# Altium PCB TP3_2.PcbDoc
Units mm, origin at the board's own origin, x right, y up, seen from the top; angles counter-clockwise.
Board outline 41.5 x 68 mm, 2 copper layers (Top Layer, Bottom Layer); 36 components, 23 nets, 140 pads, 2 vias.
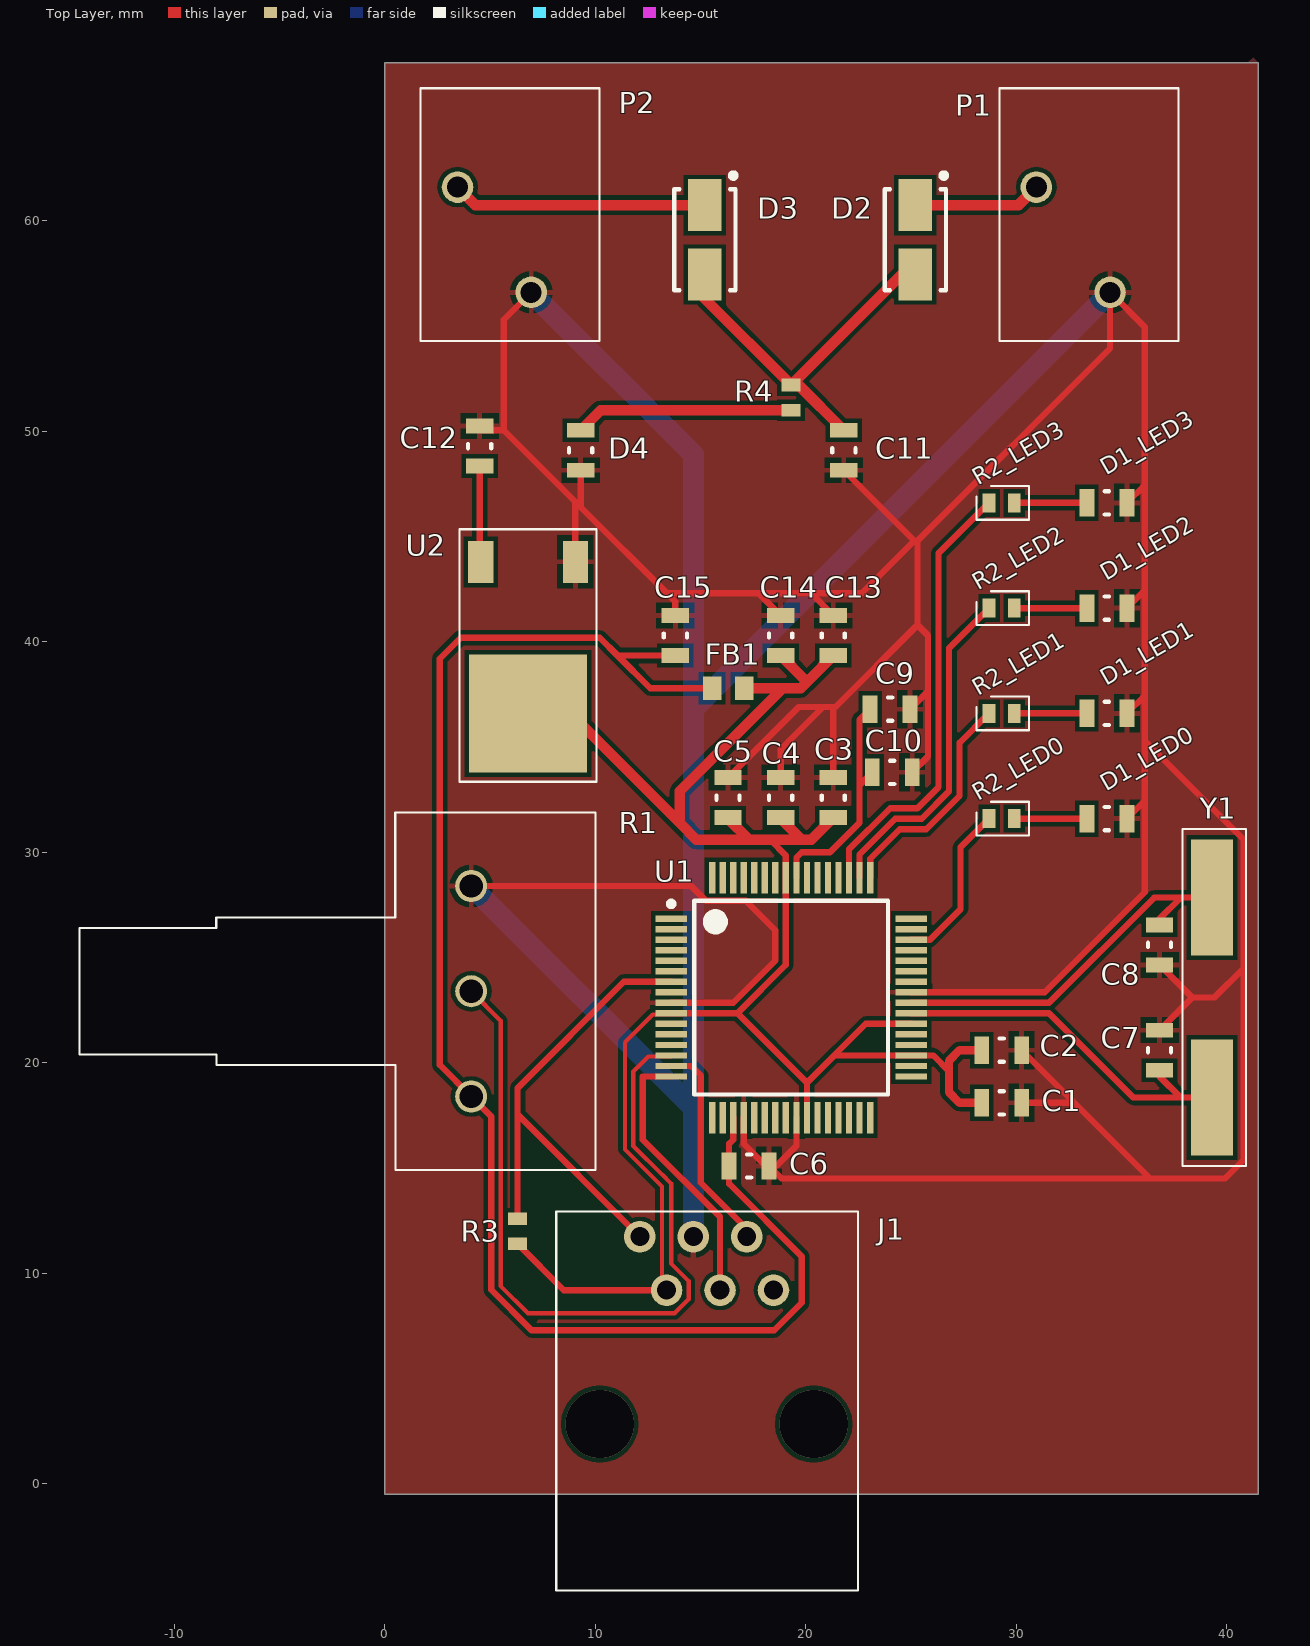
[diagram p0: Top Layer view]
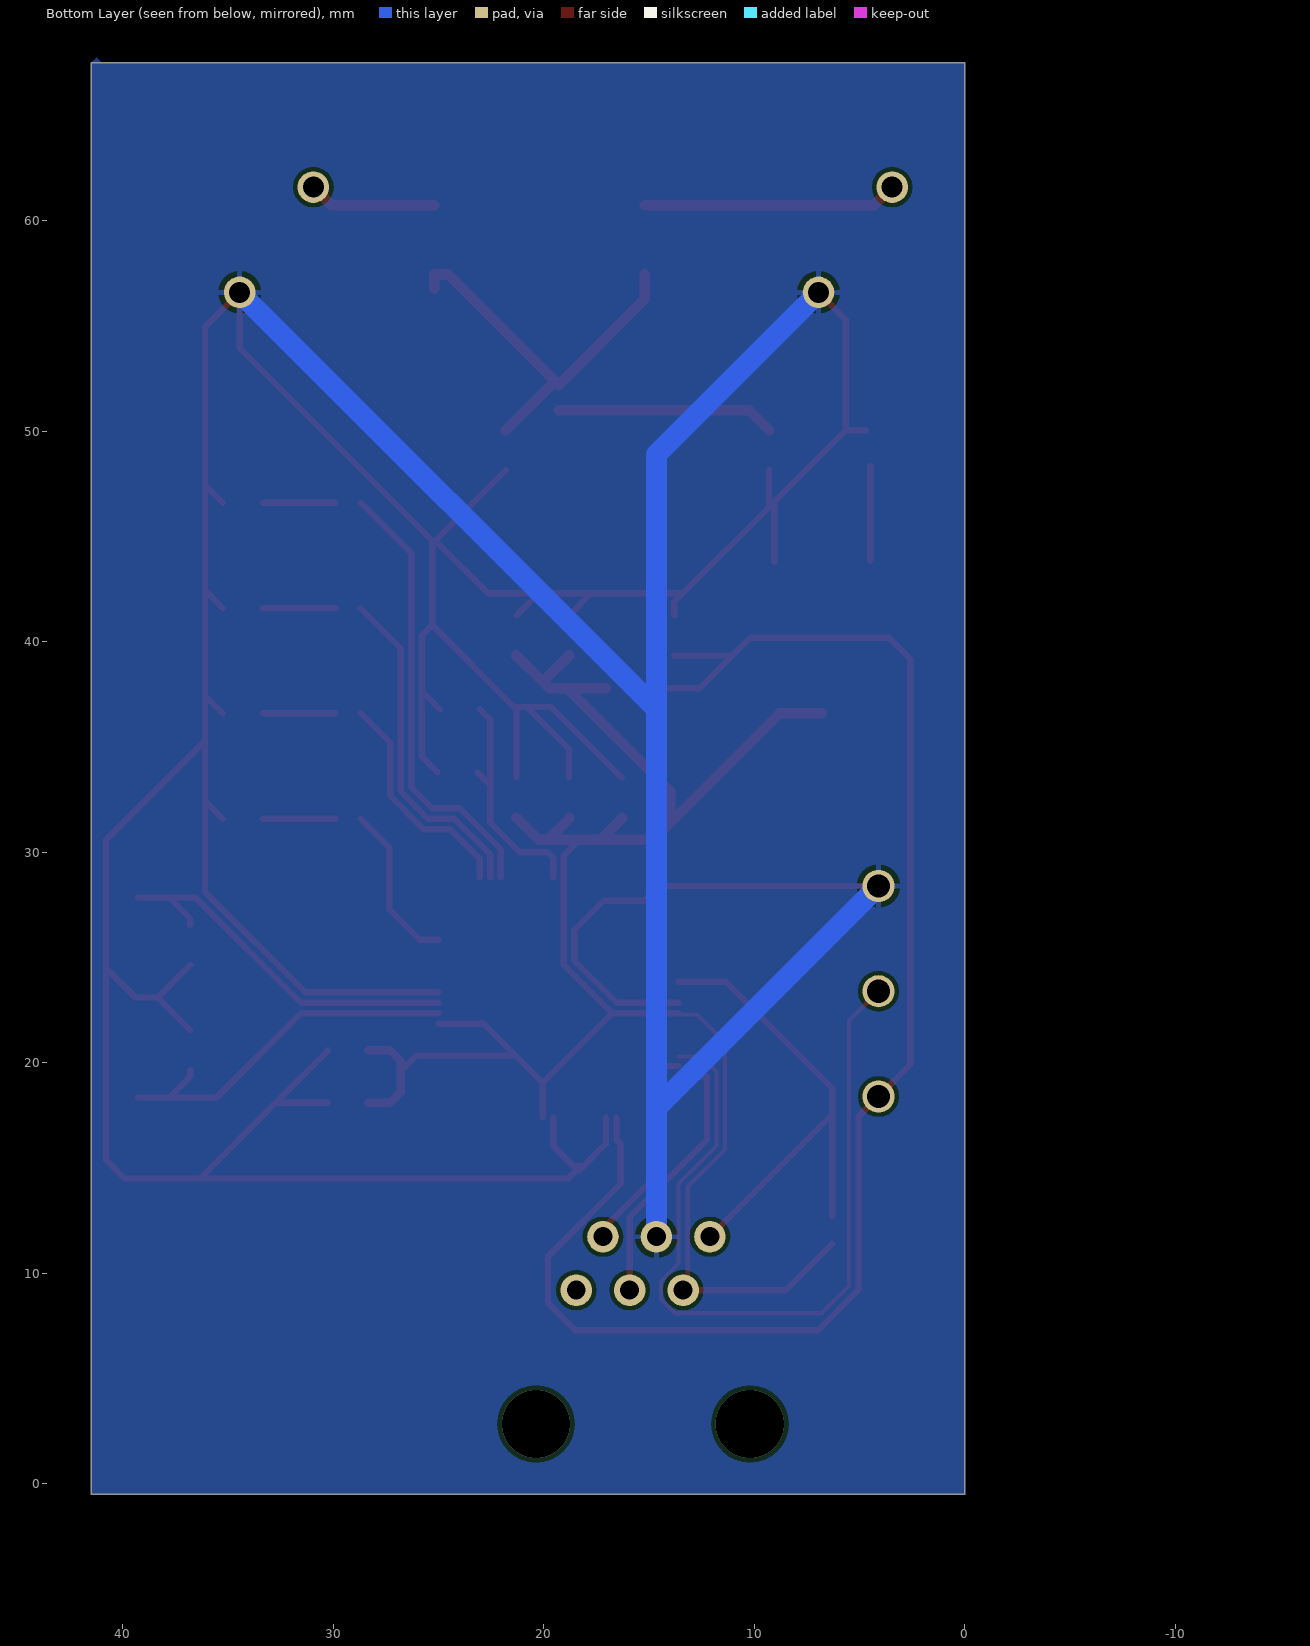
[diagram p1: Bottom Layer view, seen from below]

## Layer stack, top to bottom
Top Solder: solder mask 0.0102, Solder Resist, Dk 3.5
Top Layer: signal copper 0.0356
Dielectric 1: dielectric 0.32, FR-4, Dk 4.8
Bottom Layer: signal copper 0.0356
Bottom Solder: solder mask 0.0102, Solder Resist, Dk 3.5

## Board outline
0,-0.5 0,67.5 41.5,67.5 41.5,-0.5

## Design rules (kind name [scope] priority, off if disabled: settings)
Clearance [All] p1: gap=0.2
HoleSize [All] p1: absolutevalues=TRUE maxlimit=1000 minlimit=0.3 maxpercent=80.000 minpercent=20.000
PolygonConnect [All] p1: connectstyle=Relief reliefconductorwidth=0.254 reliefentries=4 polygonreliefangle="90 Angle" airgapwidth=0.254
RoutingVias [All] p1: holewidth=0.5 width=1 viastyle="Through Hole" minholewidth=0.3 minwidth=0.7 maxholewidth=1000 maxwidth=1000
SilkToBoardRegionClearance [InNet('No Net')] p1:
SilkToSilkClearance [All] p1: silktosilkclearance=0.1
SilkToSolderMaskClearance [IsPad] p1: minsilkscreentomaskgap=0.1 clearancetoexposedcopper=TRUE
SolderMaskExpansion [All] p1: expansion=0.102
UnpouredPolygon [All] p1: allowunpoured=FALSE
Width [All] p1: maxlimit=5 minlimit=0.2 preferedwidth=0.4
25 further rules are at their usual default settings.

## Classes and differential pairs
component class LED0: D1_LED0 R2_LED0
component class LED1: D1_LED1 R2_LED1
component class LED2: D1_LED2 R2_LED2
component class LED3: D1_LED3 R2_LED3
component class PIC: C1 C2 C3 C4 C5 C6 C7 C8 C9 C10 J1 R3
component class POWER: C11 C12 C13 C14 C15 D2 D3 D4 FB1 P1 P2 R4 U2
net class LED[0..3]: LED0 LED1 LED2 LED3
channel class led: LED0 LED1 LED2 LED3

## Components (designator, comment, footprint, x,y, rotation, side; value= is the part's Value field where it differs from the comment)
C1 "100nF" 2012/0805 29.3,18.1 r180 top
C2 "100nF" 2012/0805 29.3,20.6 r180 top
C3 "100nF" 2012/0805 21.3,32.6 r270 top
C4 "100nF" 2012/0805 18.8,32.6 r270 top
C5 "100nF" 2012/0805 16.3,32.6 r270 top
C6 "100nF" 2012/0805 17.3,15.1 r180 top
C7 "20pF" 2012/0805 36.8,20.6 r90 top
C8 "20pF" 2012/0805 36.8,25.6 r270 top
C9 "10uF" 2012/0805 24,36.8 r180 top
C10 "1uF" 2012/0805 24.1,33.8 r180 top
C11 "10uF" 2012/0805 21.8,49.1 r90 top
C12 "10uF" 2012/0805 4.5,49.3 r270 top
C13 "10uF" 2012/0805 21.3,40.3 r270 top
C14 "1uF" 2012/0805 18.8,40.3 r270 top
C15 "100nF" 2012/0805 13.8,40.3 r270 top
D1_LED0 "Green LED" 2012/0805 34.3,31.6 r0 top (schematic designator D1)
D1_LED1 "Green LED" 2012/0805 34.3,36.6 r0 top (schematic designator D1)
D1_LED2 "Green LED" 2012/0805 34.3,41.6 r0 top (schematic designator D1)
D1_LED3 "Green LED" 2012/0805 34.3,46.6 r0 top (schematic designator D1)
D2 "GF1A" SMA/DO-214AC_21 25.2,59.1 r270 top
D3 "GF1A" SMA/DO-214AC_21 15.2,59.1 r270 top
D4 "Green LED" 2012/0805 9.3,49.1 r270 top
FB1 "600r" INDC1608AN 16.3,37.8 r180 top
J1 "Program / Debug" TD03B_N 15.3,5.6 r0 top
P1 "12V Main" PHOENIX_1985195 37.7,56.6 r180 top
P2 "12V Battery" PHOENIX_1985195 10.2,56.6 r180 top
R1 "1K" Potentiometer 4.1,23.4 r90 top
R2_LED0 "330r" 1608/0603 29.3,31.6 r180 top (schematic designator R2)
R2_LED1 "330r" 1608/0603 29.3,36.6 r180 top (schematic designator R2)
R2_LED2 "330r" 1608/0603 29.3,41.6 r180 top (schematic designator R2)
R2_LED3 "330r" 1608/0603 29.3,46.6 r180 top (schematic designator R2)
R3 "4.7k" 1608/0603 6.3,12 r270 top
R4 "470r" 1608/0603 19.3,51.6 r90 top
U1 "PIC32MX764F128H-I/PT" PIC32MX 19.3,23.1 r0 top
U2 "AP1117" AP1117 6.8,36.6 r180 top
Y1 "8MHz" XTAL139X50X45 39.3,23.1 r270 top

## Footprints (in the part's own frame and the unit in brackets; to place one, negate y for a bottom-side part, rotate by r counter-clockwise, add the part's x,y. Pads: shape width x height; smd on the part's side, far side on the other; paste and mask are expansions set on the pad)
1608/0603 [mm]
  rect 0.6x0.9 smd: 1(-0.6,0) 2(0.6,0)
  body extent -0.77,-0.42 0.78,0.43, height 0.45
2012/0805 [mm]
  rect 0.7x1.3 smd: 1(-0.95,0) 2(0.95,0)
  silkscreen extent -0.1,-0.55 0.1,0.55, body extent -1,-0.6 1,0.6, height 0.45
AP1117 [mm] "Voltage Regulator"
  rect 1.2x2 smd: 1(-2.25,-7.2) 3(2.25,-7.2)
  rect 5.6x5.6 smd: 2(0,0)
  silkscreen extent -3.25,-8.75 3.25,3.25
INDC1608AN [mm]
  rect 0.88x1.12 smd: 1(-0.76,0) 2(0.76,0)
  body extent -0.9,-0.5 0.9,0.5, height 0.8
PHOENIX_1985195 [mm]
  round 1.5 hole 1: 1(6.75,-5) 2(3.25,0)
  silkscreen extent 0,-9.7 8.5,2.3
PIC32MX [mm] "TSQFP, 64-Leads, Body 10.00x10.00mm, Pitch 0.50mm, IPC Low Density"
  rect 1.5x0.3 smd: 1(-5.7,3.75) 2(-5.7,3.25) 3(-5.7,2.75) 4(-5.7,2.25) 5(-5.7,1.75) 6(-5.7,1.25) 7(-5.7,0.75) 8(-5.7,0.25) 9(-5.7,-0.25) 10(-5.7,-0.75) 11(-5.7,-1.25) 12(-5.7,-1.75) 13(-5.7,-2.25) 14(-5.7,-2.75) 15(-5.7,-3.25) 16(-5.7,-3.75) 33(5.7,-3.75) 34(5.7,-3.25) 35(5.7,-2.75) 36(5.7,-2.25) 37(5.7,-1.75) 38(5.7,-1.25) 39(5.7,-0.75) 40(5.7,-0.25) 41(5.7,0.25) 42(5.7,0.75) 43(5.7,1.25) 44(5.7,1.75) 45(5.7,2.25) 46(5.7,2.75) 47(5.7,3.25) 48(5.7,3.75)
  rect 0.3x1.5 smd: 17(-3.75,-5.7) 18(-3.25,-5.7) 19(-2.75,-5.7) 20(-2.25,-5.7) 21(-1.75,-5.7) 22(-1.25,-5.7) 23(-0.75,-5.7) 24(-0.25,-5.7) 25(0.25,-5.7) 26(0.75,-5.7) 27(1.25,-5.7) 28(1.75,-5.7) 29(2.25,-5.7) 30(2.75,-5.7) 31(3.25,-5.7) 32(3.75,-5.7) 49(3.75,5.7) 50(3.25,5.7) 51(2.75,5.7) 52(2.25,5.7) 53(1.75,5.7) 54(1.25,5.7) 55(0.75,5.7) 56(0.25,5.7) 57(-0.25,5.7) 58(-0.75,5.7) 59(-1.25,5.7) 60(-1.75,5.7) 61(-2.25,5.7) 62(-2.75,5.7) 63(-3.25,5.7) 64(-3.75,5.7)
  silkscreen extent -5.82,-4.6 4.6,4.6, body extent -5,-5 5,5, height 1.2
Potentiometer [mil]
  round 60 hole 43.31: 1(-196.85,0) 2(0,0) 3(196.85,0)
  silkscreen extent -335,-232 335,732
SMA/DO-214AC_21 [mm]
  rect 2.45x1.6 smd: 1(-1.65,0) 2(1.65,0)
  silkscreen extent -3.17,-1.45 2.4,1.48, body extent -2.37,-1.45 2.38,1.45, height 3
TD03B_N [mm]
  round 1.5 hole 0.9: 1(-3.19,6.14) 2(-1.92,3.6) 3(-0.65,6.14) 4(0.62,3.6) 5(1.89,6.14) 6(3.16,3.6)
  silkscreen extent -7.16,-10.66 7.17,7.34
XTAL139X50X45 [mm]
  rect 5.5x2 smd: 1(-4.75,0) 2(4.75,0)

## Part data
C1 C2 C3 C4 C5 C6 C7 C8 C9 C10 C12 C13 C14 C15: library part Capacitor, "Capacitor"
C11: library part Capacitor
D1_LED0 D1_LED1 D1_LED2 D1_LED3: library part LED
D2 D3: library part Diode, "Diode"
D4: library part LED, "LED"
FB1: library part Inductor, "Inductor"
J1: library part "Header 6", "Header, 6-Pin"
P1 P2: library part "Header 2", "Header, 2-Pin"
R1: library part RPot, "Potentiometer"
R2_LED0 R2_LED1 R2_LED2 R2_LED3 R3 R4: library part Resistor, "Resistor"
U1: library part PIC
U2: "Voltage Regulator"
Y1: library part Crystal, "Crystal Oscillator"

## Via types
v1: diameter 3.25, hole 3.25, Top Layer to Bottom Layer, 2 vias

## Nets (pads, with @x,y where several pads share a name; then routed paths per layer and width w, separated by ;. In a path a pad name is that pad's centre, name@x,y a point inside that pad or via, vN(x,y) a via of type N, cw(c..) or ccw(c..) an arc to the next point about the centre after c; other vN are vias at no path point)
ALIM: D2.1 P1.1 | length 6.1
  Top Layer w0.5: D2.1 30.1,60.75 P1.1
BATTERY: D3.1 P2.1 | length 12.1
  Top Layer w0.5: P2.1 4.3,60.75 D3.1
GND: C1.1 C2.1 C3.1 C4.1 C5.1 C6.1 C7.2 C8.2 C9.1 C10.1 C11.1 C12.1 C13.1 C14.1 C15.1 D1_LED0.2 D1_LED1.2 D1_LED2.2 D1_LED3.2 D4.2 J1.3 P1.2 P2.2 R1.3 U1.9 U1.20 U1.25 U1.41 U2.1 | length 325.6
  Top Layer w0.3: R1.3 14.555,28.4 15.255,27.7 17.15,27.7 18.55,26.3 18.55,24.857 16.543,22.85 U1.9 ; C12.1@4.7,50.05 5.65,50.05 ; P2.2 5.65,55.3 5.65,50.05 ; U2.1 9.05,46.65 ; D4.2 9.3,46.4 ; C15.1 13.8,41.9 13.4,42.3 ; J1.3 J1.3@14.65,11.75 ; C5.1 19.65,36.9 21.4,36.9 25.3,40.8 ; U1.20 17.05,16.15 C6.1@18.1,15.1 ; C6.1@18.3,14.9 C6.1@18.1,15.1 ; C4.1 18.8,34.9 20.8,36.9 ; C14.1 17.75,42.3 ; U1.25 19.55,16.05 18.6,15.1 C6.1 ; C3.1 21.3,36.8 ; C13.1 20.25,42.3 ; C11.1 25.15,44.8 22.65,42.3 20.25,42.3 ; C9.1 25.8,37.65 ; U1.41 31.343,23.35 36.096,28.104 36.096,32.446 ; C10.1 25.8,34.55 25.8,37.65 ; C1.1 32.75,18.1 ; C2.1 32.75,18.1 ; D1_LED0.2 36.096,32.446 ; D1_LED1.2 36.096,37.446 ; D1_LED2.2 36.096,42.446 ; D1_LED3.2 36.096,47.446 ; 36.096,44.7 36.096,42.446 ; C7.2 38.35,23.1 ; C8.2 38.35,23.1 ; 5.65,50.05 9.05,46.65 ; 9.05,46.65 9.3,46.4 ; 9.3,46.4 13.4,42.3 ; 13.4,42.3 17.75,42.3 ; 17.75,42.3 20.25,42.3 ; C6.1@18.1,15.1 C6.1 ; C6.1 18.85,14.5 36.35,14.5 ; 25.3,40.8 25.3,44.8 34.45,53.95 P1.2 36.096,54.954 36.096,47.446 ; 25.3,40.8 25.8,40.3 25.8,37.65 ; 32.75,18.1 36.35,14.5 ; 36.096,32.446 36.096,35.304 ; 36.096,35.304 40.8,30.6 40.8,24.5 ; 36.096,35.304 36.096,37.446 ; 36.096,37.446 36.096,42.446 ; 36.096,42.446 36.096,47.446 ; 36.35,14.5 39.9,14.5 40.8,15.4 40.8,24.5 ; 38.35,23.1 39.4,23.1 40.8,24.5
  Bottom Layer w1: R1.3 14.65,17.85 ; P2.2 14.65,48.9 14.65,36.8 ; J1.3 14.65,17.85 ; P1.2 14.65,36.8 ; 14.65,17.85 14.65,36.8
LED0: R2_LED0.2 U1.46 | length 7.8
  Top Layer w0.3: U1.46 25.895,25.85 27.345,27.3 27.345,30.245 R2_LED0.2
LED1: R2_LED1.2 U1.49 | length 10.9
  Top Layer w0.3: U1.49 23.05,29.693 24.457,31.1 25.714,31.1 27.3,32.686 27.3,35.2 R2_LED1.2
LED2: R2_LED2.2 U1.50 | length 16.1
  Top Layer w0.3: U1.50 22.55,29.9 24.25,31.6 25.507,31.6 26.8,32.893 26.8,39.7 R2_LED2.2
LED3: R2_LED3.2 U1.51 | length 21.3
  Top Layer w0.3: U1.51 22.05,30.15 24,32.1 25.3,32.1 26.3,33.1 26.3,44.2 R2_LED3.2
MCLR: J1.1 R3.1 U1.7 | length 23.7
  Top Layer w0.3: R3.1@6.3,12.7 6.3,17.55 ; J1.1 6.3,17.55 ; U1.7 11.35,23.85 6.3,18.8 6.3,17.55
NetC9_2: C9.2 C10.2 U1.56 | length 11.1
  Top Layer w0.3: U1.56 19.55,29.75 19.8,30 21.145,30 22.545,31.4 22.545,33.195 ; C9.2 22.545,36.295 22.545,33.195 ; C10.2 22.545,33.195
NetD1_LED0_1: D1_LED0.1 R2_LED0.1 | length 3.5
  Top Layer w0.3: R2_LED0.1 D1_LED0.1
NetD1_LED1_1: D1_LED1.1 R2_LED1.1 | length 3.5
  Top Layer w0.3: R2_LED1.1 D1_LED1.1
NetD1_LED2_1: D1_LED2.1 R2_LED2.1 | length 3.5
  Top Layer w0.3: R2_LED2.1 D1_LED2.1
NetD1_LED3_1: D1_LED3.1 R2_LED3.1 | length 3.5
  Top Layer w0.3: R2_LED3.1 D1_LED3.1
NetD4_1: D4.1 R4.1 | length 10.4
  Top Layer w0.5: D4.1 10.25,51 R4.1
NetR1_2: R1.2 U1.14 | length 38.3
  Top Layer w0.2: R1.2 5.5,22 5.5,9.4 6.8,8.1 13.765,8.1 14.43,8.765 14.43,9.635 13.6,10.465 13.6,14.266 13.176,14.69 13.16,14.69 11.8,16.05 11.8,19.591 12.509,20.3 U1.14@13.6,20.3
PGC: J1.5 U1.15 | length 10.2
  Top Layer w0.3: U1.15 14.55,19.85 15,19.4 15,14.307 17.19,12.117 J1.5
PGD: J1.4 U1.16 | length 13
  Top Layer w0.3: U1.16 12.25,19.35 12.25,16.35 15.92,12.68 J1.4
V3P3: C1.2 C2.2 C3.2 C4.2 C5.2 C13.2 C14.2 FB1.1 J1.2 R3.2 U1.10 U1.26 U1.35 U1.38 U1.57 U2.2 | length 94.8
  Top Layer w0.2: J1.2@13.01,9.57 J1.2@13.16,9.42 ; J1.2 J1.2@13.16,9.42 ; U1.10 13.6,22.3 12.726,22.3 11.4,20.974 11.4,15.884 13.16,14.124 J1.2@13.16,9.42
  Top Layer w0.3: R3.2 8.5,9.2 J1.2 ; U1.10 16.75,22.35 ; 18.3,30.6 19.05,29.85 U1.57 19.05,24.65 16.75,22.35 ; U1.26 20.05,19.05 ; 21.45,20.35 U1.35 26.05,20.35 26.8,19.6 ; U1.38 22.85,21.85 20.05,19.05 ; 16.75,22.35 20.05,19.05
  Top Layer w0.4: C1.2 27.3,18.1 26.8,18.6 26.8,19.6 26.8,20.1 27.3,20.6 C2.2
  Top Layer w0.5: U2.2 8.8,36.6 14,31.4 ; C5.2 16.3,31.6 17.3,30.6 ; FB1.1 19.75,37.8 20.15,38.2 ; C4.2 18.8,31.6 19.8,30.6 ; C14.2 19.95,38.2 20.15,38.2 ; 18.85,37.75 14,32.9 14,31.4 ; C3.2 20.25,30.6 19.8,30.6 ; C13.2 20.15,38.2 ; 14,31.4 14.8,30.6 17.3,30.6 ; 17.3,30.6 18.3,30.6 19.8,30.6
V3P3A: C6.2 C15.2 FB1.2 R1.1 U1.19 | length 74.5
  Top Layer w0.3: C15.2 11.05,39.35 ; FB1.2 12.6,37.8 11.05,39.35 ; U1.19 16.55,16.35 16.35,16.15 C6.2 16.35,14.25 19.8,10.8 19.8,8.6 18.5,7.3 6.964,7.3 5.05,9.214 5.05,17.45 R1.1 2.6,19.9 2.6,39.2 3.6,40.2 10.2,40.2 11.05,39.35
V5: C11.2 D2.2 D3.2 R4.2 | length 18.7
  Top Layer w0.5: D3.2 15.2,56.3 R4.2 24.55,57.45 D2.2 D2.2@25.2,56.8 ; R4.2@19.65,52.2 C11.2
VCC: C12.2 U2.3 | length 4.5
  Top Layer w0.3: U2.3@4.5,43.85 C12.2
X1: C7.1 U1.39 Y1.2 | length 17.7
  Top Layer w0.3: U1.39 31.55,22.35 35.55,18.35 37.8,18.35 ; C7.1 36.8,19.35 37.8,18.35 ; Y1.2 37.8,18.35
X2: C8.1 U1.40 Y1.1 | length 18.1
  Top Layer w0.3: U1.40 31.55,22.85 36.55,27.85 37.8,27.85 ; C8.1 36.8,26.85 37.8,27.85 ; Y1.1 37.8,27.85
pads on no net: J1.6 U1.1 U1.2 U1.3 U1.4 U1.5 U1.6 U1.8 U1.11 U1.12 U1.13 U1.17 U1.18 U1.21 U1.22 U1.23 U1.24 U1.27 U1.28 U1.29 U1.30 U1.31 U1.32 U1.33 U1.34 U1.36 U1.37 U1.42 U1.43 U1.44 U1.45 U1.47 U1.48 U1.52 U1.53 U1.54 U1.55 U1.58 U1.59 U1.60 U1.61 U1.62 U1.63 U1.64
copper on no net:
  other v1: 10.21,2.84 20.37,2.84

## Polygon pours and split planes (outlines as drawn)
GND on Top Layer "Top Layer-No Net" (solid, remove dead copper, pour order 6): 0,67.5 41,67.5 41.25,67.75 41.5,67.5 41.5,-0.5 0.4,-0.5 0,-0.5 0,-0.1
GND on Bottom Layer "Top Layer-GND" (solid, remove dead copper, pour order 5): 0,67.5 41,67.5 41.25,67.75 41.5,67.5 41.5,-0.5 0.4,-0.5 0,-0.5 0,-0.1

## Silkscreen, mask and mechanical layers (free items; w line width, h text height)
Top Overlay:
  lines w0.1: 28.1,31.9 28.1,30.8 30.6,30.8 30.6,32.4 28.8,32.4 ; 28.1,36.9 28.1,35.8 30.6,35.8 30.6,37.4 28.8,37.4 ; 28.1,41.9 28.1,40.8 30.6,40.8 30.6,42.4 28.8,42.4 ; 28.1,46.9 28.1,45.8 30.6,45.8 30.6,47.4 28.8,47.4 ; 37.9,15.1 40.9,15.1 40.9,31.1 37.9,31.1 37.9,15.1
Drill Drawing:
  circle w0.254: c46.465,8.898 r0.635
  lines w0.254: 45.83,4.453 47.1,4.453 47.1,5.723 45.83,5.723 45.83,4.453 ; 45.83,13.343 47.1,13.343 46.465,12.073 45.83,13.343 ; 45.83,16.201 46.148,16.201 46.465,15.883 46.783,16.201 47.1,16.201 46.783,16.518 47.1,16.836 46.783,16.836 46.465,17.153 46.148,16.836 45.83,16.836 46.148,16.518 45.83,16.201
  lines w0.381: 44.1,3.31 142.626,3.31 ; 44.1,18.55 142.626,18.55 ; 58.092,-0.5 58.092,22.36 ; 75.817,-0.5 75.817,22.36 ; 109.995,-0.5 109.995,22.36 ; 122.844,-0.5 122.844,22.36 ; 44.1,-0.5 142.626,-0.5 142.626,22.36 44.1,22.36 44.1,-0.5
  text "Symbol" at 46.386,19.693 h1.83
  text "Hit Count" at 59.235,19.693 h1.83
  text "Finished Hole Size" at 76.96,19.693 h1.83
  text "Plated" at 111.138,19.693 h1.83
  text "Hole Type" at 123.987,19.693 h1.83
  text "2" at 59.235,15.883 h1.52
  text "3.250mm (127.95mil)" at 76.96,15.883 h1.52
  text "PTH" at 111.138,15.883 h1.52
  text "Round" at 123.987,15.883 h1.52
  text "3" at 59.235,12.073 h1.52
  text "1.100mm (43.31mil)" at 76.96,12.073 h1.52
  text "PTH" at 111.138,12.073 h1.52
  text "Round" at 123.987,12.073 h1.52
  text "4" at 59.235,8.263 h1.52
  text "1.000mm (39.37mil)" at 76.96,8.263 h1.52
  text "PTH" at 111.138,8.263 h1.52
  text "Round" at 123.987,8.263 h1.52
  text "6" at 59.235,4.453 h1.52
  text "0.900mm (35.43mil)" at 76.96,4.453 h1.52
  text "PTH" at 111.138,4.453 h1.52
  text "Round" at 123.987,4.453 h1.52
  text "15 Total" at 59.235,0.643 h1.52
board shape:
  lines w0.2: 0,-0.5 41.5,-0.5 41.5,67.5 ; 0,-0.5 0,67.5 41.5,67.5 ; 0,-0.5 0,-0.5 ; 41.5,67.5 41.5,67.5 ; 41.5,67.5 41.5,67.5

## Dimensions
0,-0.5 to 41.5,-0.5 on Mechanical 16
0,67.5 to 0,-0.5 on Mechanical 16